# EAGLE board oshpark_edit (EAGLE 7.7.0)
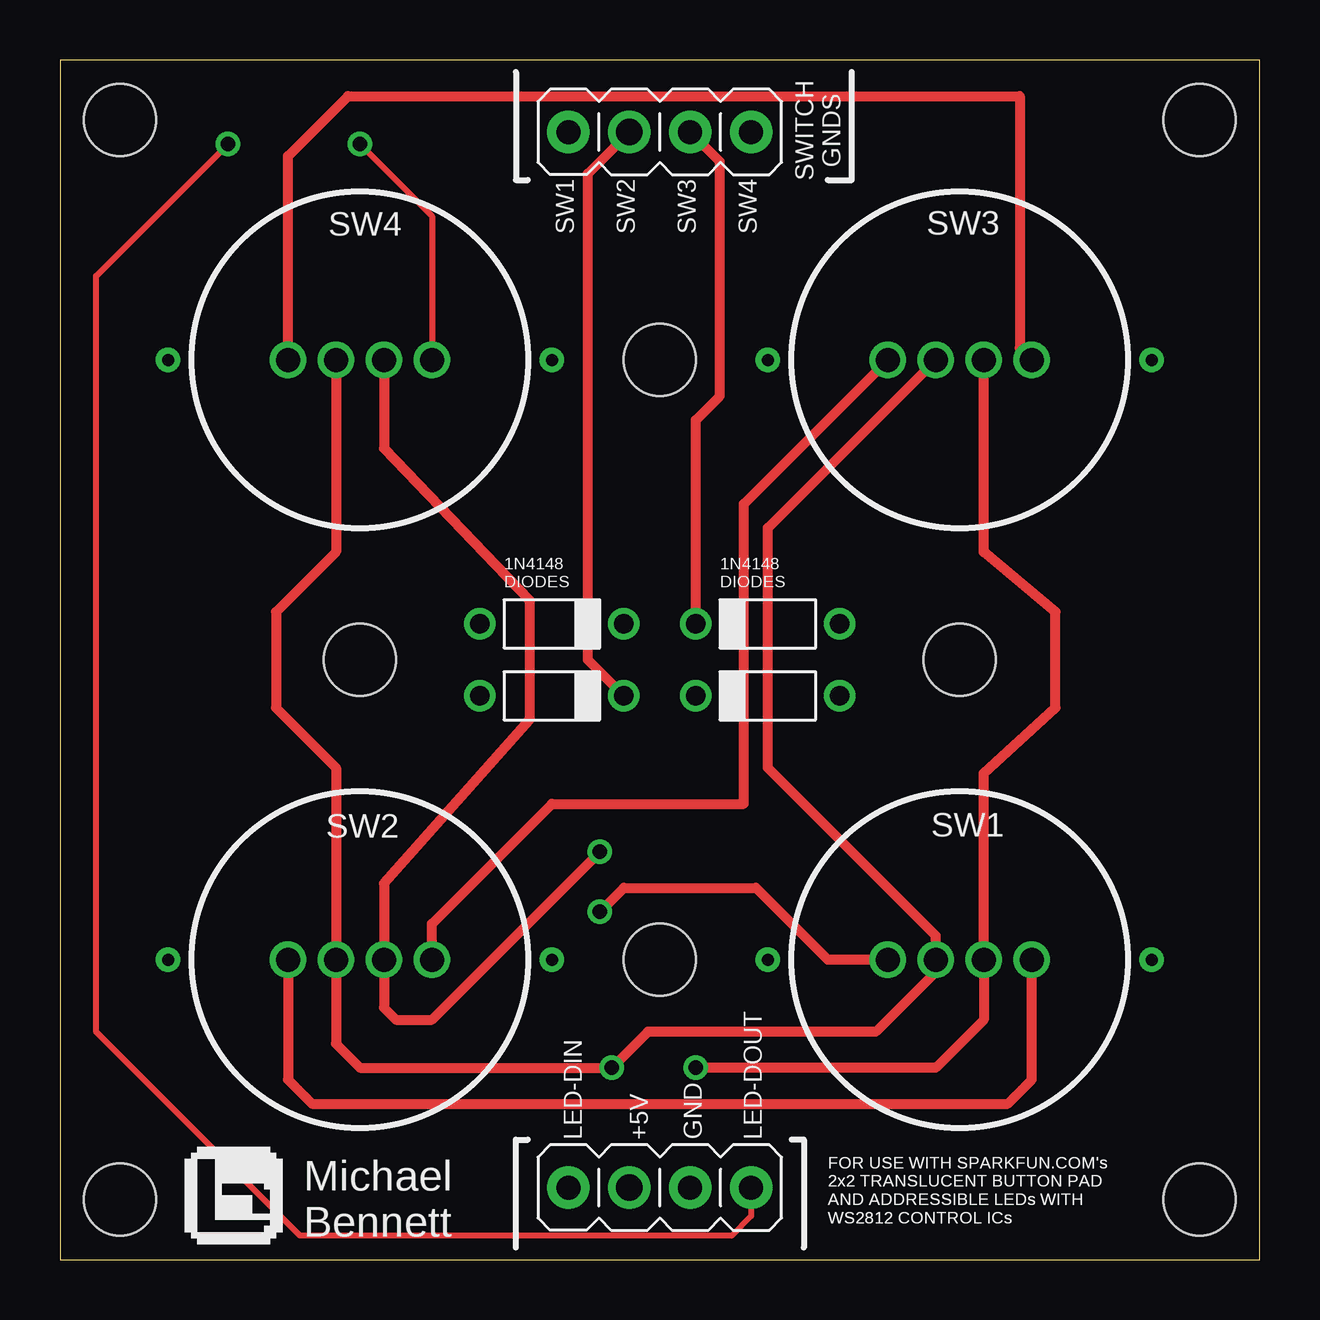
[diagram p0: board, top side]
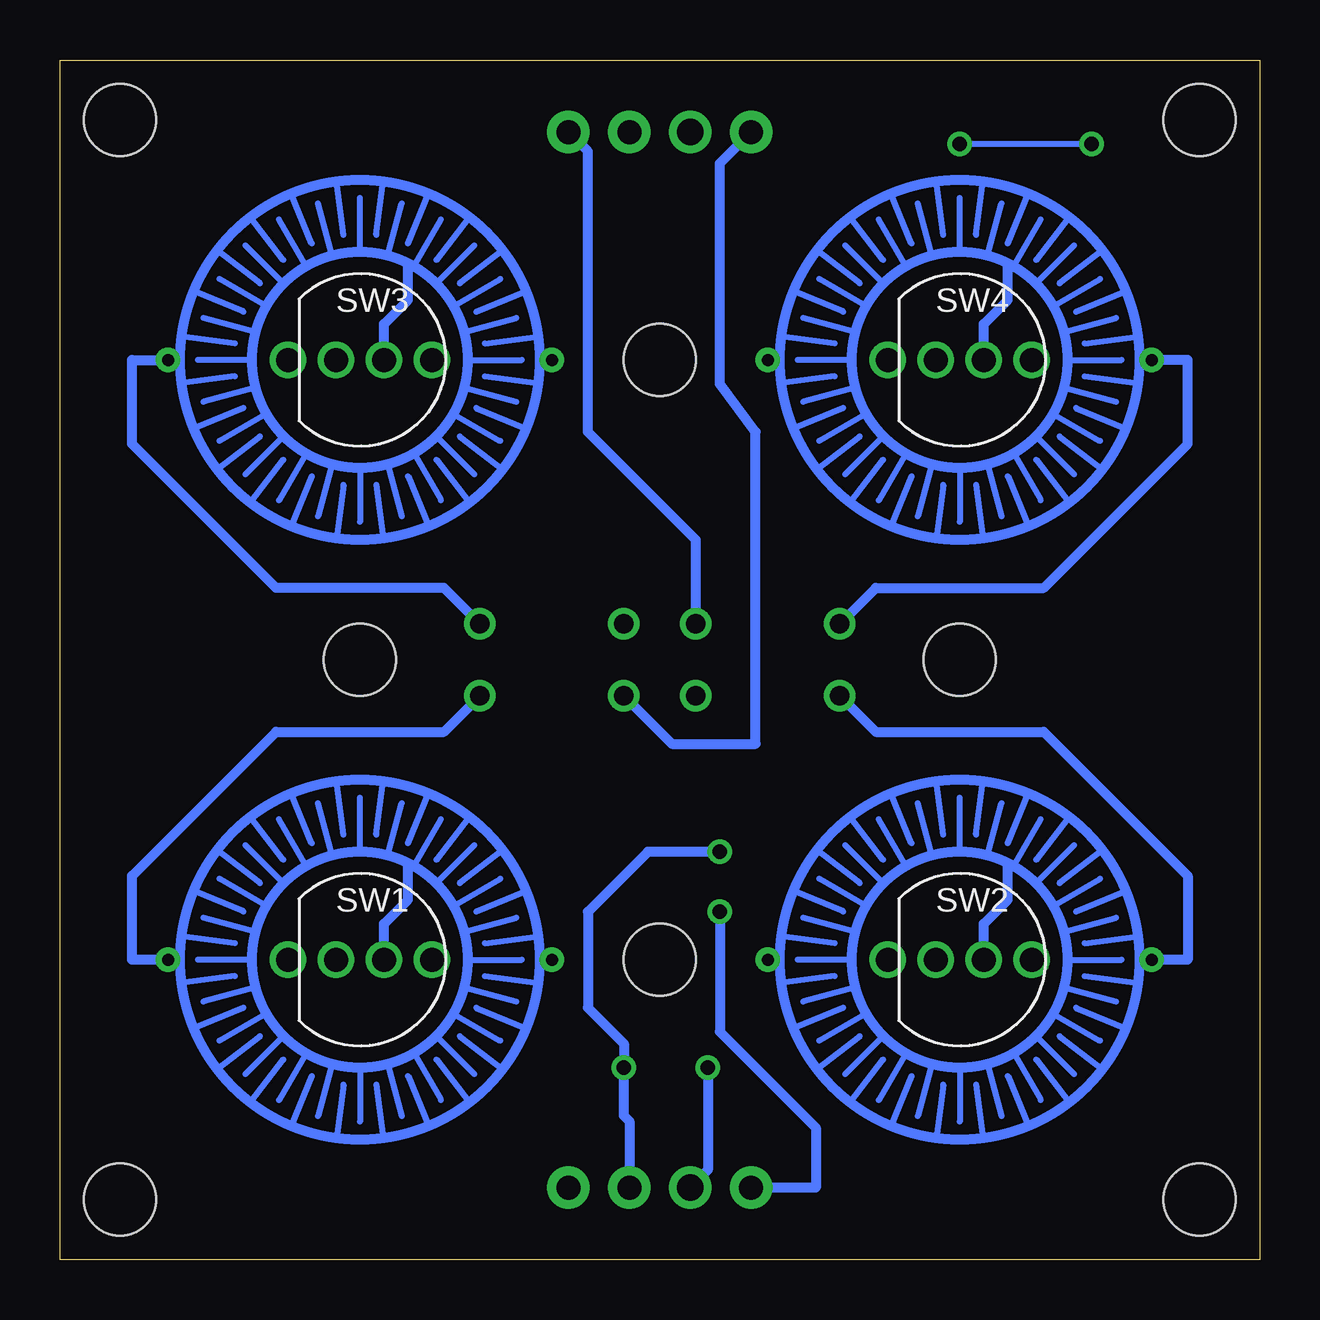
[diagram p1: board, bottom side, seen from below]

Size 50 x 50 mm. Coordinates in mm from the lower left corner, seen from the top.
Outline: 0,0 50,0 50,50 0,50 0,0
Copper layers (1*16): Top 0.035mm / dielectric 1.5mm / Bottom 0.035mm
Design rules "default": minimum track width 10mil, minimum drill 24mil, track to track 8mil, track to pad 8mil, pad to pad 8mil, via to via 8mil, smd to smd 8mil, copper to edge 40mil, drill to drill 8mil, minimum pad ring 10mil, minimum via ring 8mil, stop-mask expansion 4mil, vias tented up to drill 0mil, thermal gap 10mil
Holes 3 mm at 2.5,2.5 47.5,2.5 25,12.5 12.5,25 25,37.5 37.5,25 2.5,47.5 47.5,47.5

## Footprints (pad centres in the part's own frame; a part is rotated, then mirrored left to right if it is on the bottom)
2X2_BUTTON_RGB_ADDR = drill 1: DIN -3,0; DOUT 3,0; GND 1,0; VDD -1,0 | drill 0.5: SWGND1 -8,0; SWGND2 8,0
1N4181 = drill 0.8: P$1 -3,0; P$2 3,0
J4X1 = drill 1 pad 1.778: P$1 0,3.81; P$3 0,-1.27; P$4 0,-3.81 | drill 1.1 pad 1.778: P$2 0,1.27

## Placement (x,y rotation side)
C1  2X2_BUTTON_RGB_ADDR  [2X2_BUTTON_RGB_ADDR]  37.5,12.5 0 top
C2  2X2_BUTTON_RGB_ADDR  [2X2_BUTTON_RGB_ADDR]  12.5,12.5 0 top
C3  2X2_BUTTON_RGB_ADDR  [2X2_BUTTON_RGB_ADDR]  37.5,37.5 0 top
C4  2X2_BUTTON_RGB_ADDR  [2X2_BUTTON_RGB_ADDR]  12.5,37.5 0 top
U$1  1N4148  [1N4181]  20.5,26.5 0 top
U$2  1N4148  [1N4181]  29.5,26.5 180 top
U$3  1N4148  [1N4181]  20.5,23.5 0 top
U$4  1N4148  [1N4181]  29.5,23.5 180 top
U$5  JUMPER4X1  [J4X1]  25,3 90 top
U$6  JUMPER4X1  [J4X1]  25,47 90 top

## Library data of the parts
C1-C4 = Bennett; C1: C1
U$1-U$6 = Bennett

## Nets
N$1: C1.GND C2.GND C3.GND C4.GND U$5.P$3
N$2: C3.SWGND2 U$2.P$1
N$3: C4.SWGND1 U$1.P$1
N$4: C1.VDD C2.VDD C3.VDD C4.VDD U$5.P$2
N$5: C2.SWGND1 U$3.P$1
N$6: C1.SWGND2 U$4.P$1
N$7: C1.DIN U$5.P$1
N$8: C4.DOUT U$5.P$4
N$9: U$4.P$2 U$6.P$1
N$10: U$3.P$2 U$6.P$2
N$11: U$2.P$2 U$6.P$3
N$12: U$1.P$2 U$6.P$4
SIG2: C1.DOUT C2.DIN
SIG3: C2.DOUT C3.DIN
SIG4: C3.DOUT C4.DIN

## Tracks (layer width: path | path; a pad name or v marks a point on that pad's centre or on a via)
N$1  (via drill 0.6)
  Top 0.406: C3.GND 38.5,29.48 41.49,27 41.49,23 38.5,20.26 C1.GND 38.5,10 36.5,8 v26.5,8 | C4.GND 13.5,33.82 19.56,27.5 19.56,22.5 13.5,15.67 C2.GND 13.5,10.5 14,10 15.5,10 v22.5,17
  Bottom 0.406: U$5.P$3 26.27,5.77 26.5,6 v26.5,8 26.5,9 28,10.5 28,14.5 25.5,17 v22.5,17
N$2
  Bottom 0.406: U$2.P$1 34,28 41,28 47,34 47,37.5 C3.SWGND2
N$3
  Bottom 0.406: U$1.P$1 16,28 9,28 3,34 3,37.5 C4.SWGND1
N$4  (via drill 0.6)
  Top 0.406: C3.VDD 29.5,30.5 29.5,20.5 36.5,13.5 C1.VDD 36.5,12 34,9.5 24.5,9.5 v23,8 12.5,8 11.5,9 C2.VDD 11.5,20.5 9,23 9,27 11.5,29.5 C4.VDD
  Bottom 0.406: v23,8 23,3.73 U$5.P$2
N$5
  Bottom 0.406: U$3.P$1 16,22 9,22 3,16 3,12.5 C2.SWGND1
N$6
  Bottom 0.406: U$4.P$1 34,22 41,22 47,16 47,12.5 C1.SWGND2
N$7  (via drill 0.6)
  Top 0.406: C1.DIN 32,12.5 29,15.5 23.5,15.5 v22.5,14.5
  Bottom 0.406: v22.5,14.5 22.5,9.5 18.5,5.5 18.5,3 U$5.P$1
N$8  (via drill 0.6)
  Top 0.254: U$5.P$4 28.81,1.81 28,1 10,1 1.5,9.5 1.5,41 v7,46.5 | v12.5,46.5 15.5,43.5 C4.DOUT
  Bottom 0.254: v7,46.5 v12.5,46.5
N$9
  Bottom 0.406: U$4.P$2 24.5,21.5 21.01,21.5 21.01,34.5 22.5,36.5 22.5,45.69 U$6.P$1
N$10
  Top 0.406: U$3.P$2 22,25 22,45.27 U$6.P$2
N$11
  Top 0.406: U$2.P$2 26.5,35 27.5,36 27.5,45.77 U$6.P$3
N$12
  Bottom 0.406: U$1.P$2 23.5,30 28,34.5 28,46.19 U$6.P$4
SIG2
  Top 0.406: C2.DIN 9.5,7.5 10.5,6.5 39.5,6.5 40.5,7.5 C1.DOUT
SIG3
  Top 0.406: C2.DOUT 15.5,14 20.5,19 28.5,19 28.5,31.5 C3.DIN
SIG4
  Top 0.406: C4.DIN 9.5,46 12,48.5 40,48.5 40,38 C3.DOUT

## Text on the board
tPlace: 1N4148 / DIODES | 1N4148 / DIODES | Michael / Bennett | FOR USE WITH SPARKFUN.COM's / 2x2 TRANSLUCENT BUTTON PAD / AND ADDRESSIBLE LEDs WITH / WS2812 CONTROL ICs | FOR USE WITH SPARKFUN.COM's / 2x2 TRANSLUCENT BUTTON PAD / AND ADDRESSIBLE LEDs WITH / WS2812 CONTROL ICs
tNames: SWITCH / GNDS | SW1 | SW2 | SW3 | SW4 | SW4 | SW3 | SW2 | SW1 | LED-DIN | +5V | GND | LED-DOUT
bNames: SW4 | SW3 | SW2 | SW1